# Altium PCB decawave_carrier.PcbDoc
Units mm, origin at the board's own origin, x right, y up, seen from the top; angles counter-clockwise.
Board outline 15.88 x 16.89 mm, 2 copper layers (Top Layer, Bottom Layer), stack 1.071 mm thick; 19 components, 35 nets, 103 pads, 31 vias.
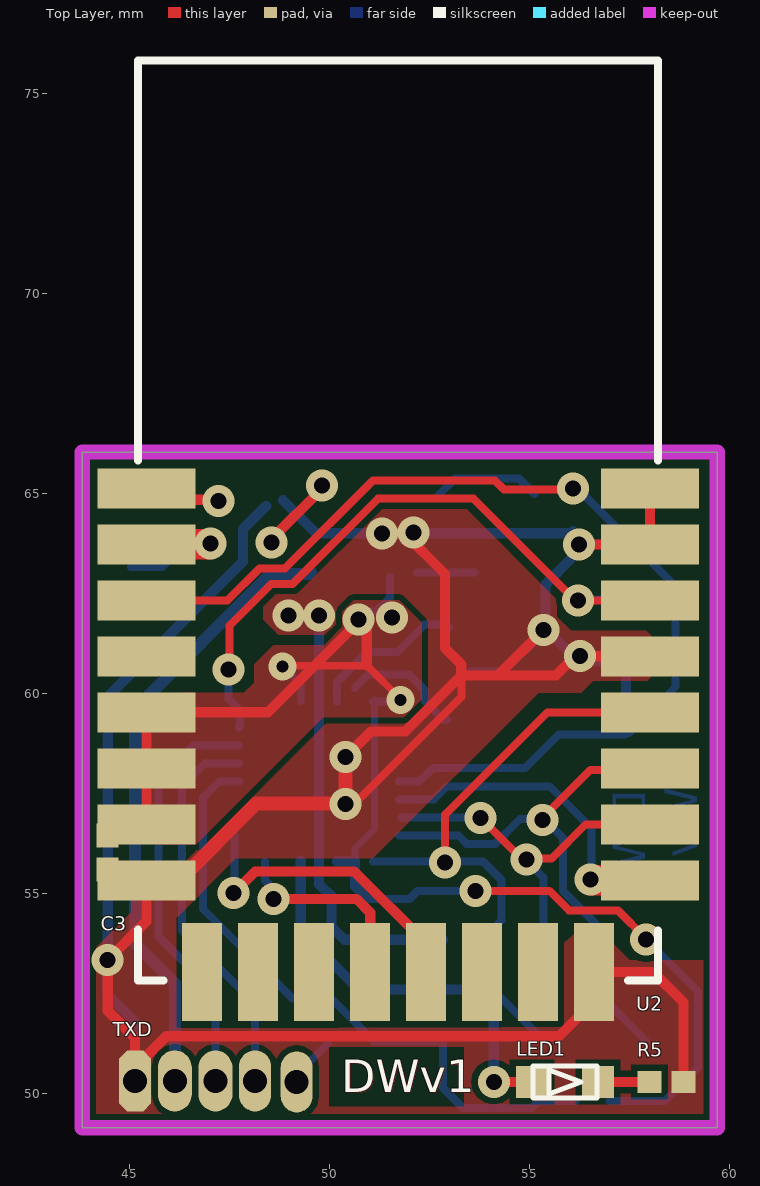
[diagram p0: Top Layer view]
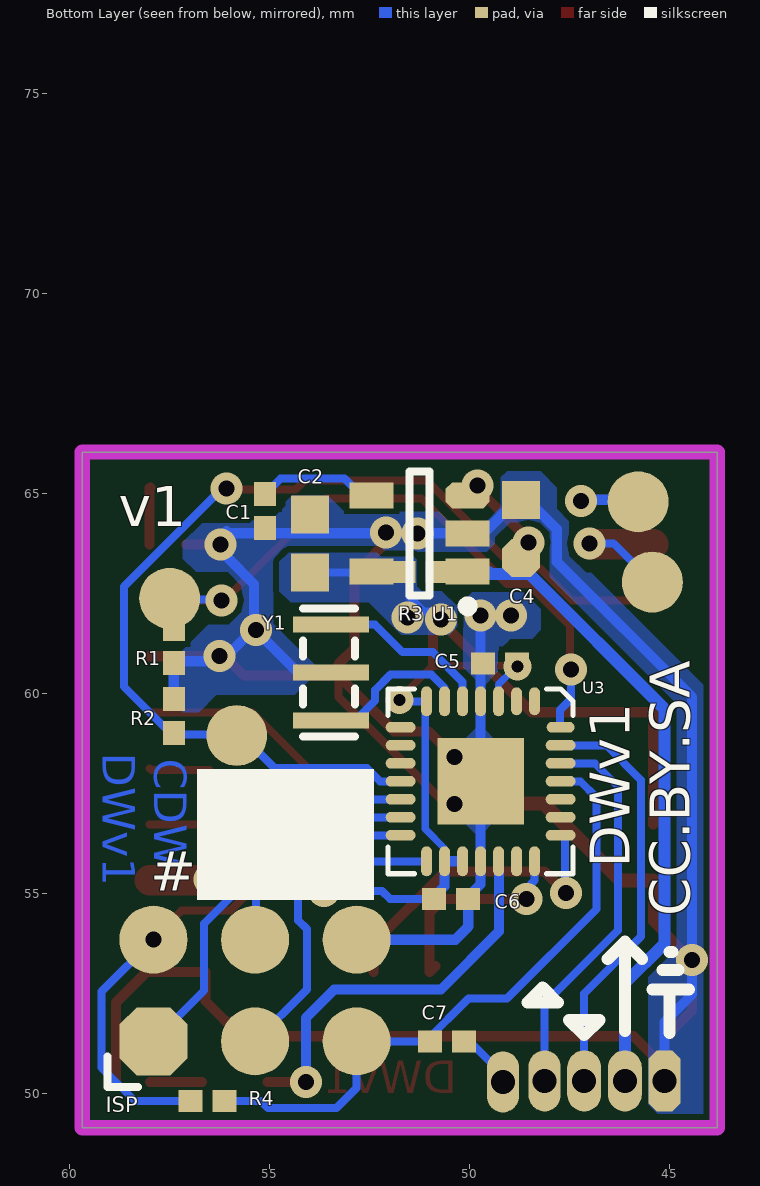
[diagram p1: Bottom Layer view, seen from below]

## Layer stack, top to bottom
Top Layer: signal copper 0.0356
Dielectric: core 1, FR-4, Dk 4.8
Bottom Layer: signal copper 0.0356

## Board outline
43.815,49.149 59.69,49.149 59.69,66.04 43.815,66.04

## Design rules (kind name [scope] priority, off if disabled: settings)
Clearance [All] p1: gap=0.152
ComponentClearance [All] p1 off: gap=0.254 collisioncheckmode=3 verticalgap=0.254 showdistances=FALSE
MinimumSolderMaskSliver [All] p1 off: minsoldermaskwidth=0.254
PolygonConnect [All] p1: connectstyle=Direct reliefconductorwidth=0.254 reliefentries=4 polygonreliefangle="90 Angle"
RoutingVias [All] p1: holewidth=0.711 width=1.27 viastyle="Through Hole" minholewidth=0.3 minwidth=0.6 maxholewidth=0.711 maxwidth=1.27
SilkToSilkClearance [All] p1 off: silktosilkclearance=0.254
SilkscreenOverComponentPads [All] p1 off: minsilkscreentomaskgap=0.254
SolderMaskExpansion SolderMaskExpansion_1 [IsVia] p1: expansion=-1
SolderMaskExpansion [All] p2: expansion=0.102
TestPointUsage [All] p1: valid=0 allowmultiple=FALSE
Testpoint [All] p1: side=15 testpointundercomponent=TRUE minsize=1.016 maxsize=2.54 preferedsize=1.524 minholesize=0 maxholesize=1.016 preferedholesize=0.813 testpointgrid=0.025 style=1023 order=0123456789
Width [All] p1: maxlimit=1.27 minlimit=0.152 preferedwidth=0.254 minimp=50.000000 maximp=50.000000 favimp=50.000000
20 further rules are at their usual default settings.

## Classes and differential pairs
component class decawave_carrier: C1 C3 C4 C6 C7 ISP LED1 R1 R2 R3 R4 R5 TXD U1 U2 U3 Y1

## Components (designator, comment, footprint, x,y, rotation, side; value= is the part's Value field where it differs from the comment)
C1 "0402" V0402 55.118,64.567 r90 bottom
C2 "0603" V0603#1 54,63.754 r270 bottom
C3 "0402" V0402 44.45,56.032 r270 top
C4 "0603" V0603#2 48.717,64.11 r270 bottom
C5 "0402" V0402 49.251,60.757 r180 bottom
C6 "0402" V0402 50.47,54.864 r0 bottom
C7 "0402" V0402 50.571,51.308 r180 bottom
ISP "Programmer PCB Contacts" ISP 57.912,51.308 r180 bottom
LED1 "KP-1608SURC" KP-1608SURC 55.88,50.292 r0 top
R1 "0402" V0402RES 57.404,59.436 r270 bottom
R2 "0402" V0402RES 57.404,61.189 r90 bottom
R3 "0402" V0402RES 51.232,63.043 r180 bottom
R4 "470" V0402RES 56.566,49.809 r0 bottom
R5 "470" V0402RES 58.42,50.292 r0 top
TXD "Header 4" PICOBLADE_53047-0410 44.704,50.292 r270 top
U1 "3.3V LDO 50mV Dropout 700mA" SOT-23-OT5_N 51.257,64.008 r0 bottom
U2 "DWM1000" DWM1000 45.212,52.832 r0 top
U3 "ATmega328P - MLF28" 28M1 48.384,59.808 r270 bottom
Y1 "XOSC 8MHz 0.1%" XOSC 53.467,60.528 r90 bottom

## Footprints (in the part's own frame and the unit in brackets; to place one, negate y for a bottom-side part, rotate by r counter-clockwise, add the part's x,y. Pads: shape width x height; smd on the part's side, far side on the other; paste and mask are expansions set on the pad)
28M1 [mm]
  rect 2.159x2.159 smd: 0(2,-1.35)
  oval 0.699x0.272 smd: 1(0,0) 2(0,-0.45)
  oval 0.75x0.272 smd: 3(0,-0.9) 4(0,-1.35) 5(0,-1.8) 6(0,-2.25) 7(0,-2.7) 15(4,-2.7) 16(4,-2.25) 17(4,-1.8) 18(4,-1.35) 19(4,-0.9) 20(4,-0.45) 21(4,0)
  oval 0.272x0.75 smd: 8(0.65,-3.35) 9(1.1,-3.35) 10(1.55,-3.35) 11(2,-3.35) 12(2.45,-3.35) 13(2.9,-3.35) 14(3.35,-3.35) 22(3.35,0.65) 23(2.9,0.65) 24(2.45,0.65) 25(2,0.65) 26(1.55,0.65) 27(1.1,0.65)
  oval 0.272x0.699 smd: 28(0.65,0.65)
  silkscreen extent -0.31,-3.66 4.31,0.96, body extent 0,-3.3 4,0.7, height 1
DWM1000 [mm]
  rect 2.45x1 smd: 1(0.205,12.3) 2(0.205,10.9) 3(0.205,9.5) 4(0.205,8.1) 5(0.205,6.7) 6(0.205,5.3) 7(0.205,3.9) 8(0.205,2.5) 8(0.205,2.5) 17(12.795,2.5) 18(12.795,3.9) 19(12.795,5.3) 20(12.795,6.7) 21(12.795,8.1) 22(12.795,9.5) 23(12.795,10.9) 24(12.795,12.3)
  rect 1x2.45 smd: 9(1.6,0.205) 10(3,0.205) 11(4.4,0.205) 12(5.8,0.205) 13(7.2,0.205) 14(8.6,0.205) 15(10,0.205) 16(11.4,0.205)
  silkscreen extent 0,0 13,23, body extent 0,0 13,23, height 4
ISP [mm] "In Circuit Programming Connector"
  oct 1.7x1.7 smd paste-2: 1(0,0)
  round 1.7 smd paste-2: 2(0,2.54) 3(2.54,0) 4(2.54,2.54) 5(5.08,0) 6(5.08,2.54)
  silkscreen extent -1.14,-1.14 -0.38,-0.38
KP-1608SURC [mm]
  rect 0.8x0.8 smd: 1(-0.825,0) 2(0.825,0)
  silkscreen extent -0.8,-0.4 0.8,0.4, body extent -0.81,-0.41 0.79,0.38, height 1
PICOBLADE_53047-0410 [mil]
  oct 60x31.5 hole 23.62: 1(-1,17)
  oval 60x33.46 hole 23.62: 2(-1,56) 3(-1,96)
  oval 60x31.5 hole 23.62: 4(-1,135)
SOT-23-OT5_N [mm] "SOT23, 5-Leads, Body 2.9x1.6mm, Pitch 0.95mm, Lead Span 2.7mm, IPC Medium Density"
  rect 1.1x0.65 smd: 1(-1.2,0.95) 2(-1.2,0) 4(1.2,-0.95) 5(1.2,0.95)
  oct 1.1x0.65 smd: 3(-1.2,-0.95)
  silkscreen extent -1.32,-1.55 0.25,1.95, body extent -0.9,-1.55 0.9,1.55, height 1.45
V0402 [mm] "Chip Capacitor; Body 1.0 x 0.5 mm (LxW typ)"
  rect 0.6x0.55 smd: 1(-0.425,0) 2(0.425,0)
  body extent -0.5,-0.25 0.5,0.25, height 0.5
V0402RES [mm] "Chip Capacitor; Body 1.0 x 0.5 mm (LxW typ)"
  rect 0.6x0.55 smd: 1(-0.425,0) 2(0.425,0)
  body extent -0.5,-0.25 0.5,0.25, height 0.25
V0603#1 [mm] "Chip Capacitor; Body 1.6 x 0.8 mm (LxW typ)"
  rect 0.95x0.95 smd: 1(-0.725,0) 2(0.725,0)
  body extent -0.8,-0.4 0.8,0.4, height 0.7
V0603#2 [mm] "Chip Capacitor; Body 1.6 x 0.8 mm (LxW typ)"
  rect 0.95x0.95 smd: 1(-0.725,0)
  oct 0.95x0.95 smd: 2(0.725,0)
  body extent -0.8,-0.4 0.8,0.4, height 0.7
XOSC [mm]
  rect 0.4x1.9 smd: 1(-1.2,0) 2(0,0) 3(1.2,0)
  silkscreen extent -1.6,-0.6 1.6,0.7, body extent -1.6,-0.6 1.6,0.7, height 0.9

## Part data
C1: library part Cap, "Capacitor"
C2 C4: library part K0603_100nF_50V_X7R, "Capacitor"
C3 C7: library part CAP, "Capacitor"
C5 C6: library part Cap, "CAPACITOR, 100NF, 16V, X7R"
ISP: library part "Header 3X2", "Surface Contacts for Programming: 2 x 3 pads, no solder paste, top only"
LED1: "Led rouge 0603 (GRZ 10/2007)"
R1 R2 R3: library part Res3, "Resistor"
R4 R5: library part RES1
TXD: "Header, 4-Pin"
U1: library part LP2992AIM5-5.0, "Micropower 250 mA Low-Noise Ultra Low-Dropout Regulator in SOT-23 and LLP Packages"
U2: library part DW1000
U3: library part ATmega88PA_MMH, "8-Bit AVR Microcontroller with 8K Bytes of In-System Programmable Flash Memory"
Y1: library part XOSC, "Crystal Oscillator"

## Free pads (board coordinates)
  oval 0.8x1.524 hole 0.6: 0(49.174,50.292)
  round 1.524 smd far side: 3(45.441,62.789) 3(45.796,64.795) 3(55.829,58.953) 3(57.506,62.382)

## Via types
v1: diameter 0.8, hole 0.4, Top Layer to Bottom Layer, 29 vias
v2: diameter 0.7, hole 0.3, Top Layer to Bottom Layer, tented both sides, 1 vias
v3: diameter 0.7, hole 0.3, Top Layer to Bottom Layer, 1 vias

## Nets (pads, with @x,y where several pads share a name; then routed paths per layer and width w, separated by ;. In a path a pad name is that pad's centre, name@x,y a point inside that pad or via, vN(x,y) a via of type N, cw(c..) or ccw(c..) an arc to the next point about the centre after c; other vN are vias at no path point)
+3.3V: C2.2 C3.1 C5.2 C6.2 ISP.2 R3.1 R4.2 U1.5 U2.5 U2.6 U2.7 U3.3 U3.7 U3.16 U3.17 | length 37.7
  Top Layer w0.178: v3@48.841,60.697 50.936,60.697 v2@51.791,59.842
  Top Layer w0.2: v1@53.696,54.864 53.899,55.067 55.499,55.067 55.987,54.58 57.206,54.58 v1@57.912,53.873
  Top Layer w0.254: U2.7 U2.5 48.458,59.532 v1@50.902,61.976 ; 50.927,60.706 v1@50.927,61.976
  Bottom Layer w0.178: C5.2@48.949,60.646 48.949,60.567 49.284,60.232 U3.3 ; U3.16 50.634,56.131 51.117,56.614 51.117,58.935 U3.7@51.117,59.842
  Bottom Layer w0.2: C6.2 51.994,54.864 52.197,55.067 v1@53.543,55.067 ; v1@51.003,62.052 51.156,62.052 51.511,62.408 R3.1@51.511,62.916 ; U3.7 51.731,59.808 v2(51.765,59.842) ; U1.5@52.181,63.029 C2.2@53.619,63.029 ; R4.2 58.369,49.809 59.207,50.648 59.207,52.553 v1(57.912,53.848)
  Bottom Layer w0.254: U3.17 U3.16 50.634,55.183 C6.2@50.86,54.957
  Bottom Layer w0.559: v1@53.543,55.067 v1(53.645,55.067)
  other v1: 50.724,61.849 51.562,61.9
  other v3: 48.816,60.672
AD1: U3.20
AIN: U3.9
BYPCA: C1.2 U1.4 | length 2.7
  Bottom Layer w0.2: U1.4@52.715,64.958 53.137,65.38 54.73,65.38 C1.2
CS: U2.17 U3.12 | length 8.3
  Top Layer w0.762: v1(56.515,55.347) 56.53,55.332 U2.17
  Bottom Layer w0.2: U3.12 52.608,57.358 52.934,57.683 55.499,57.683 56.54,56.642 56.54,55.499 v1@56.744,55.296
DTR: C7.2 pad.0 | length 1.3
  Bottom Layer w0.2: pad.0 pad.0@49.174,50.571 ; pad.0@49.225,50.521 C7.2@49.962,51.257
EXT: pad.3@45.796,64.795 U2.1 | length 3.7
  Top Layer w0.254: U2.1@45.373,64.846 v1@47.269,64.846
  Bottom Layer w0.254: pad.3@45.517,64.846 v1@47.295,64.846
  other v1: 47.219,64.821
GND: C1.1 C2.1 C3.2 C4.1 C5.1 C6.1 ISP.6 R1.1 R2.1 R5.2 TXD.1 U1.2 U2.8 U2.16 U2.21 U2.23 U2.24 U3.0 U3.4 U3.18 Y1.2 | length 96.5
  Top Layer w0.2: v1@50.458,57.243 50.613,57.243 53.289,59.919 53.289,60.731
  Top Layer w0.254: TXD.1 45.136,50.66 45.911,51.435 55.73,51.435 56.612,52.317 U2.16 58.088,53.037 58.845,52.28 R5.2 ; TXD.1@45.136,50.521 45.136,51.384 44.45,52.07 v1(44.45,53.34) 45.417,54.307 U2.8@45.417,55.332 ; v1(50.39,58.411) 51.034,59.055 51.892,59.055 53.289,60.452 ; v1@51.232,64.008 51.867,64.008 52.883,62.992 52.883,61.138 53.289,60.731 53.289,60.452 ; 54.204,60.452 v1(55.347,61.595) ; v1@56.083,63.856 v1@56.286,63.652 ; v1@56.134,60.932 U2.21 ; v1@56.134,60.935 55.651,60.452 53.289,60.452 ; v1@56.286,63.729 U2.23@57.099,63.729 ; U2.24@57.988,65.151 U2.24 U2.23
  Top Layer w0.35: U2.8@45.417,55.332 46.239,55.332 48.158,57.252 50.336,57.252 50.39,57.198 v1(50.39,57.243) ; v1(50.39,58.411) 50.39,57.31 v1@50.458,57.243
  Bottom Layer w0.254: TXD.1 45.136,51.791 44.45,52.476 44.45,59.919 47.828,63.297 47.828,64.11 C4.1@48.412,64.694 ; v1@48.819,61.951 v1(49.733,61.951) ; C4.1@48.83,64.835 49.657,64.008 U1.2 ; v1@49.734,61.849 U3.4 U3.0 U3.18 49.734,55.232 C6.1@50.06,54.906 ; U1.2@49.752,64.008 v1@56.058,64.008 ; C6.1@50.042,54.957 50.042,54.175 50.368,53.848 ISP.6 ; Y1.2@53.518,60.528 54.305,60.528 v1@55.397,61.62 ; v1@56.083,64.059 56.083,63.424 55.397,62.738 v1@55.397,61.62 ; 57.125,60.808 56.21,60.808 v1@55.397,61.62 ; R1.1 R2.1
  other v1: 56.261,60.935 48.971,61.951 56.236,63.729 51.308,64.008 52.095,64.033
GPIO7: U2.4
ICP1: U3.10
IRQ: pad.3@57.506,62.382 R2.2 U2.22 U3.28 | length 16.7
  Top Layer w0.2: v1@47.473,60.579 47.498,60.604 47.498,61.697 48.539,62.738 49.073,62.738 51.206,64.872 53.594,64.872 56.134,62.332 U2.22
  Bottom Layer w0.2: v1@47.473,60.477 47.473,59.868 47.752,59.588 47.752,59.176 U3.28 ; v1@56.083,62.357 56.109,62.357 pad.3@57.379,62.357
  other v1: 47.473,60.604 56.21,62.332
LED: LED1.1 U3.19 | length 10.1
  Top Layer w0.254: v1(54.102,50.292) LED1.1
  Bottom Layer w0.254: U3.19@49.276,55.829 49.276,54.051 50.724,52.603 53.391,52.603 54.102,51.892 v1(54.102,50.292)
LIPO: C4.2 R3.2 TXD.2 U1.1 U1.3 | length 17.5
  Top Layer w0.254: v1(48.539,63.779) v1@48.539,63.932 ; v1@48.565,63.881 v1@49.835,65.151
  Bottom Layer w0.3: TXD.2 46.126,52.756 45.136,53.746 45.136,59.614 48.514,62.992 49.479,62.992 U1.1@49.53,63.043
  other v1: 49.809,65.202
MISO: ISP.1 U2.19 U3.14 | length 13.9
  Top Layer w0.2: v1@55.194,56.871 55.296,56.871 56.515,58.09 57.965,58.09 U2.19
  Bottom Layer w0.2: U3.14 53.211,56.458 53.425,56.244 54.135,56.244 54.762,56.871 55.347,56.871 55.829,56.388 55.829,55.067 56.642,54.254 56.642,52.578 ISP.1
  other v1: 55.321,56.845
MOSI: ISP.4 U2.18 U3.13 | length 9.4
  Top Layer w0.2: v1@53.492,56.947 53.721,56.947 54.788,55.88 55.55,55.88 56.402,56.732 U2.18
  Bottom Layer w0.2: U3.13@51.791,56.908 v1@53.684,56.908 ; v1@54.915,55.829 55.347,55.397 55.347,53.873 ISP.4
  other v1: 54.915,55.855 53.772,56.896
NetLED1_2: LED1.2 R5.1 | length 1.3
  Top Layer w0.254: LED1.2 R5.1
OC0A: U3.8
OC2B: U3.1
RESET: C7.1 ISP.5 R4.1 U3.25 | length 16
  Bottom Layer w0.2: U3.25 47.242,57.808 46.838,57.404 46.838,54.61 49.073,52.375 50.038,52.375 51.105,51.308 ISP.5 52.832,50.14 53.332,49.64 55.05,49.64 55.22,49.809 R4.1
RST: pad.3@55.829,58.953 R1.2 U2.3 U3.11 | length 26.8
  Top Layer w0.2: U2.3@46.228,62.332 U2.3 47.448,62.332 48.243,63.127 48.878,63.127 51.079,65.329 54.127,65.329 54.356,65.1 v1@56.109,65.1
  Bottom Layer w0.2: U3.11 52.245,57.808 52.578,58.141 54.889,58.141 55.728,58.979 R1.2@57.379,58.979 ; v1@56.007,65.1 56.222,65.1 58.649,62.674 58.649,60.174 57.486,59.011 R1.2
  other v1: 56.083,65.126
RXD: TXD.4 U3.26 | length 9.8
  Bottom Layer w0.2: U3.26 46.879,58.258 46.304,57.683 46.304,54.077 48.133,52.248 TXD.4
RXLED: U2.13 U3.22 | length 7.8
  Top Layer w0.254: v1(47.6,55.016) 48.133,55.55 50.619,55.55 52.412,53.757 U2.13
  Bottom Layer w0.2: v1@47.625,55.194 U3.22@47.625,56.451
RXOKLED: U2.15
SCK: ISP.3 U2.20 U3.15 | length 15.4
  Top Layer w0.2: v1@52.883,55.829 52.883,56.972 55.443,59.532 U2.20
  Bottom Layer w0.2: U3.15 51.088,55.804 53.831,55.804 54.297,55.337 54.297,54.332 54.077,54.112 54.077,52.603 ISP.3
  other v1: 52.883,55.778
SCL: U3.24
SDA: U3.23
SFDLED: U2.14
SPIPHA: U2.9
SPIPOL: U2.10
TXD: TXD.3 U3.27 | length 10.5
  Bottom Layer w0.2: TXD.3 47.142,52.502 45.72,53.924 45.72,57.836 46.592,58.708 U3.27
TXLED: U2.12 U3.21 | length 5
  Top Layer w0.254: v1(48.59,54.864) 50.673,54.864 51.012,54.525 U2.12 U2.12@50.857,53.192
  Bottom Layer w0.2: U3.21 48.384,55.324 v1@48.59,55.118
WAKE: pad.3@45.441,62.789 U2.2 | length 4
  Top Layer w0.762: U2.2 v1@46.99,63.732
  Bottom Layer w0.2: pad.3@45.034,63.17 45.822,63.17 46.406,63.754 v1@47.244,63.754
  other v1: 47.015,63.754
X1: U3.5 Y1.3 | length 3.9
  Bottom Layer w0.2: U3.5 50.184,60.293 50.927,61.036 51.689,61.036 52.375,61.722 52.934,61.722 Y1.3@52.984,61.671
X2: U3.6 Y1.1 | length 3.1
  Bottom Layer w0.2: U3.6@50.634,60.146 50.965,60.477 51.982,60.477 52.368,60.092 52.368,59.824 52.857,59.334 Y1.1@52.934,59.334
XCK: U3.2
pads on no net: U2.11

## Polygon pours and split planes (outlines as drawn)
+3.3V on Top Layer "NORELIEF" (solid, pour order 1000): 45.695,56.236 46.66,56.236 49.835,59.411 51.867,59.411 52.299,59.842 52.299,61.773 51.74,62.332 50.597,62.332 50.317,62.052 50.317,61.671 49.86,61.214 48.59,61.214 48.108,60.731 48.108,60.274 47.854,60.02 46.228,60.02 45.364,59.157 45.364,56.718 45.339,56.693
GND on Top Layer "NORELIEF" (solid, remove dead copper, pour order 1001): 43.815,49.174 43.815,53.315 45.034,54.534 45.034,55.143 45.745,55.143 49.911,59.309 51.918,59.309 52.4,59.792 52.4,61.824 51.791,62.433 50.495,62.433 50.216,62.154 50.216,61.747 49.936,61.468 48.717,61.468 48.336,61.849 48.336,62.205 48.666,62.535 49.174,62.535 51.308,64.668 53.365,64.668 55.677,62.357 55.677,61.925 56.032,61.57 57.912,61.57 58.09,61.392 58.09,60.477 57.937,60.325 56.591,60.325 56.286,60.02 55.22,60.02 51.079,55.88 47.65,55.88 46.177,54.407 46.177,51.638 55.804,51.664 55.804,53.721 56.261,54.127 56.718,54.127 57.506,53.34 59.69,53.34 59.766,53.264 59.766,49.276 59.614,49.124 59.563,49.174
+3.3V on Bottom Layer "NORELIEF" (solid, pour order 1002): 50.317,62.179 50.698,62.56 51.206,62.56 51.333,62.687 51.333,63.348 51.41,63.424 52.222,63.424 52.324,63.525 54.534,63.525 54.762,63.297 54.762,62.56 54.483,62.281 52.527,62.281 51.714,61.468 50.521,61.468 50.317,61.671
GND on Bottom Layer "NORELIEF" (solid, pour order 1003): 48.235,61.595 48.235,62.103 48.666,62.535 49.936,62.535 50.165,62.306 50.165,61.722 50.165,60.655 49.759,60.249 49.759,59.233 50.165,58.826 50.165,56.794 49.784,56.413 49.327,56.871 49.327,56.896 49.327,58.801 49.682,59.157 49.682,60.147 49.301,60.528 49.301,61.062 49.073,61.29 48.997,61.366 48.438,61.366
GND on Bottom Layer "NORELIEF" (solid, pour order 1004): 53.797,60.63 54.915,61.747 54.915,62.84 54.915,63.348 54.585,63.678 52.324,63.678 52.197,63.551 49.987,63.551 49.581,63.551 49.378,63.754 49.378,63.906 48.997,64.287 48.26,64.287 48.082,64.11 48.006,64.033 48.006,63.373 48.006,62.56 45.009,59.563 45.009,53.772 45.517,53.264 45.542,53.238 45.542,49.733 44.983,49.174 43.967,49.174 43.967,60.02 46.965,63.017 47.092,63.017 47.523,63.449 47.523,64.313 47.828,64.618 47.828,65.151 48.235,65.557 49.073,65.557 49.225,65.405 49.225,64.668 49.581,64.313 50.546,64.313 50.775,64.541 53.137,64.541 53.543,64.948 54.458,64.948 54.61,64.795 54.61,64.694 54.889,64.414 55.347,64.414 55.499,64.262 56.82,64.262 57.175,63.906 57.175,63.373 56.845,63.043 56.058,63.043 55.702,62.687 55.702,62.052 56.032,61.722 56.54,61.722 57.252,61.011 57.429,60.833 57.429,59.868 57.429,59.792 57.175,59.538 56.769,59.538 56.337,59.969 54.966,59.969 54.381,59.969 53.772,60.579

## Keep-outs
Keep-Out Layer:
  the board outline again, w0.381

## Other copper
Top Layer:
  text "DWv1" at 50.317,50.013 h0.81
Bottom Layer:
  text "DWv1" at 59.182,58.522 h0.81 r90
  text "CDW" at 57.887,58.369 h0.81 r90

## Silkscreen, mask and mechanical layers (free items; w line width, h text height)
Top Overlay:
  text "DWv1" at 50.292,50.038 h0.81
Bottom Overlay:
  rectangle: 52.4,54.839 56.82,58.115
  lines w0.3: 44.526,52.603 45.441,52.603 ; 44.78,53.086 45.187,53.086 ; 44.933,53.543 45.009,53.543 ; 45.009,51.511 45.009,52.578 ; 45.695,53.365 46.126,53.797 46.482,53.442 46.558,53.365 ; 46.126,51.562 46.126,53.772 ; 46.761,51.841 47.523,51.841 47.142,51.46 46.761,51.841 ; 47.803,52.273 48.565,52.273 48.184,52.654 47.803,52.273
  text "v1" at 58.776,64.186 h1
  text "DWv1" at 45.999,55.651 h1 r270
  text "#" at 57.988,55.067 h1
  text "CC.BY.SA" at 44.501,54.432 h1 r270

## Dimensions
59.69,49.149 to 43.815,49.149 on Mechanical 1
43.815,49.149 to 43.815,66.04 on Mechanical 1